# Altium PCB BeagleBoneCape.PcbDoc
Units mil, origin at the board's own origin, x right, y up, seen from the top; angles counter-clockwise.
Board outline 3400 x 2150 mil, 2 copper layers (L1, L2), stack 62.8 mil thick; 28 components, 19 nets, 178 pads, 13 vias.
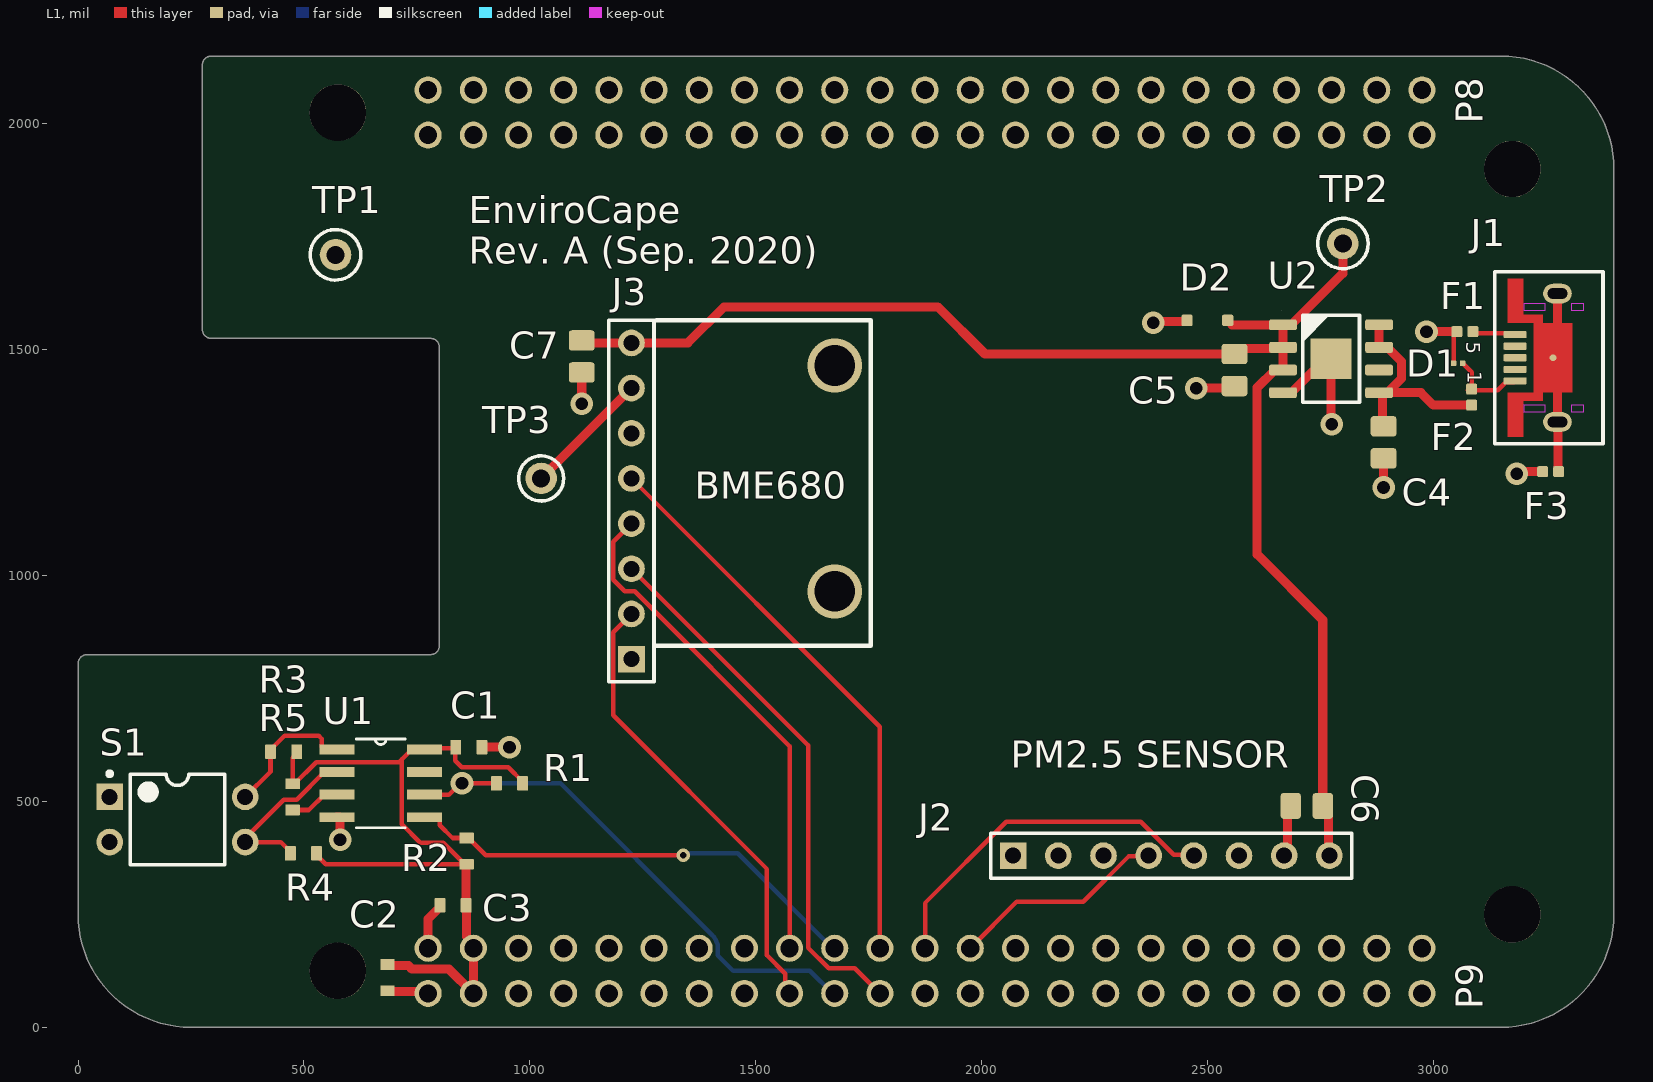
[diagram p0: L1 view]
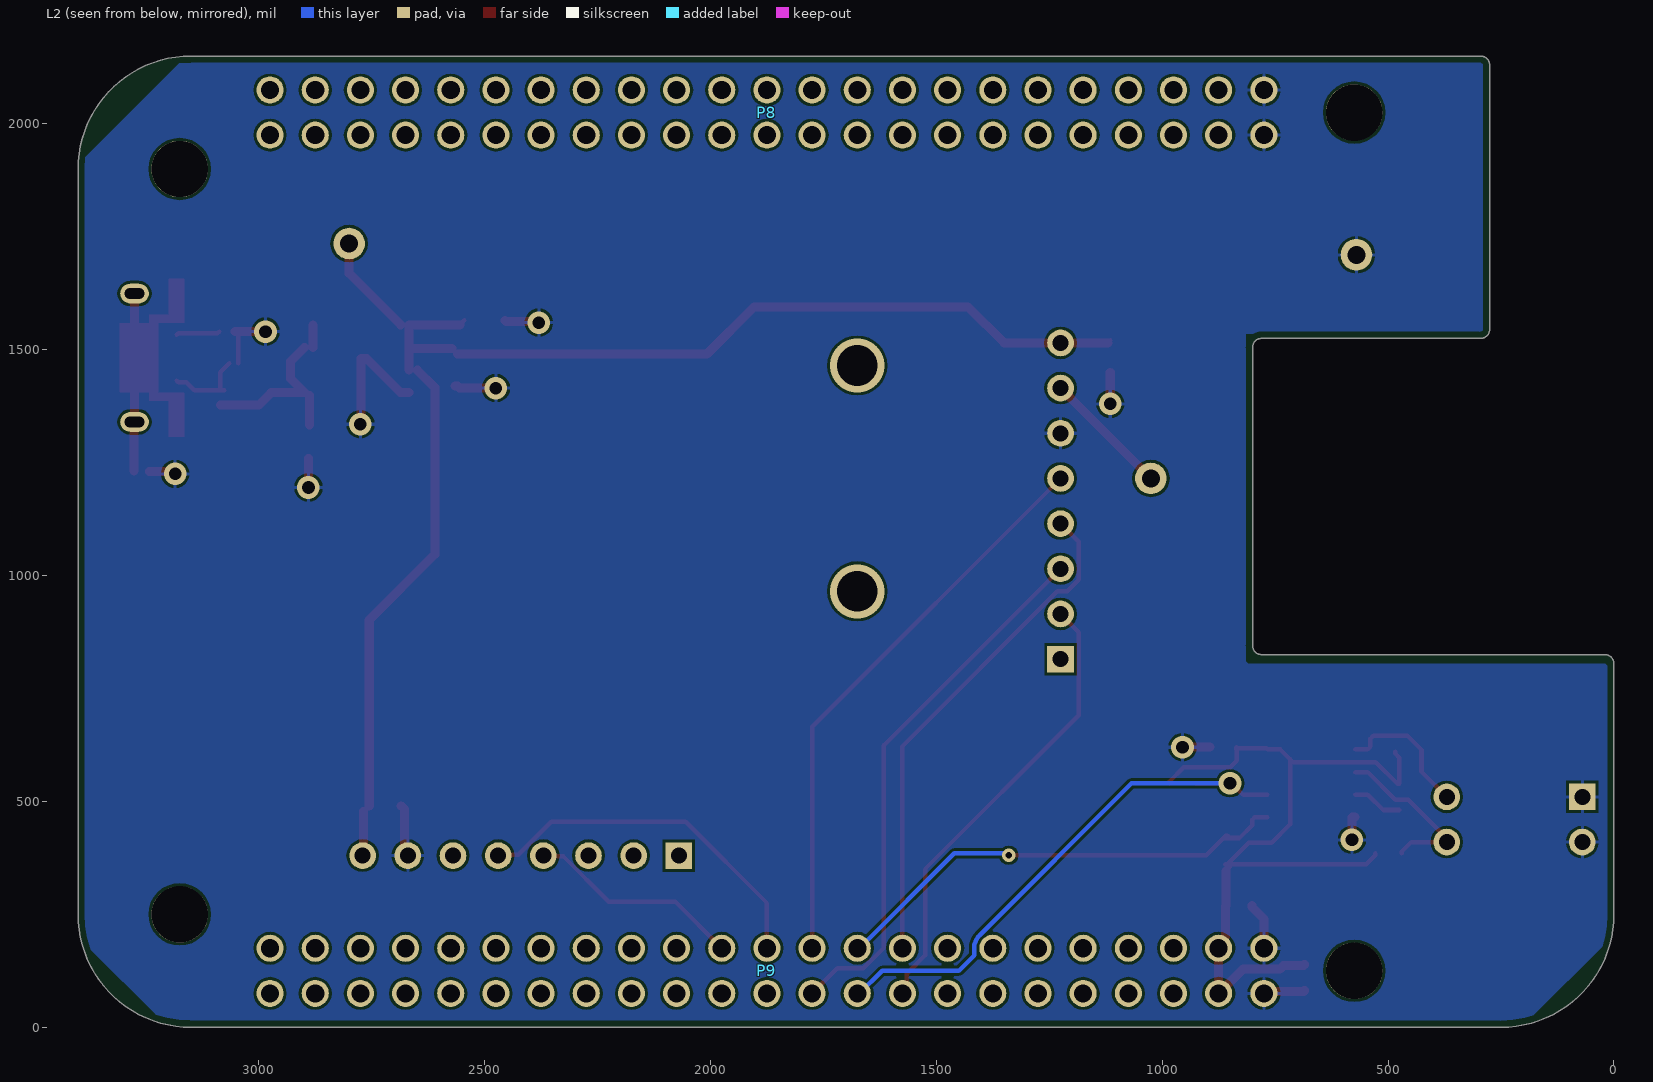
[diagram p1: L2 view, seen from below]

## Layer stack, top to bottom
Top Solder: solder mask 0.1, Solder Resist, Dk 1
L1: signal copper 1.4
Core: dielectric 60, FR-4, Dk 4.6
L2: signal copper 1.4
Bottom Solder: solder mask 0.1, Solder Resist, Dk 1

## Board outline
0,250 0,805 cw(c20,805) 20,825 780,825 ccw(c780,845) 800,845 800,1505 ccw(c780,1505) 780,1525 295,1525 cw(c295,1545) 275,1545 275,2130 cw(c295,2130) 295,2150 3150,2150 cw(c3150,1900) 3400,1900 3400,250 cw(c3150,250) 3150,0 250,0 cw(c250,250)

## Design rules (kind name [scope] priority, off if disabled: settings)
BoardOutlineClearance [All] p1: gap=15 ignorepadtopadclearanceinfootprint=FALSE
Clearance [All] p1: gap=6 ignorepadtopadclearanceinfootprint=FALSE except(0: Arc-Hole Track-Hole SMDPad-Hole THPad-Hole Via-Hole Fill-Hole Poly-Hole Region-Hole Text-Hole)
ComponentClearance [All] p1: gap=1 collisioncheckmode=3 verticalgap=1 showdistances=FALSE
DiffPairsRouting [All] p1: maxlimit=393.7 minlimit=6 mostfreqgap=8 toplayer_minwidth=6 toplayer_maxwidth=15 toplayer_prefwidth=8 bottomlayer_minwidth=6 bottomlayer_maxwidth=15 bottomlayer_prefwidth=8 maxuncoupledlength=500
HoleSize [All] p1: absolutevalues=TRUE maxlimit=265 minlimit=13 maxpercent=80.000 minpercent=20.000
HoleToHoleClearance [All] p1: gap=10 allowstackedmicrovias=FALSE
MinimumAnnularRing [All] p1: minimumring=7
MinimumSolderMaskSliver [All] p1: minsoldermaskwidth=0
PlaneClearance [All] p1: clearance=10
PlaneConnect [All] p1: planeconnectstyle=Direct reliefexpansion=16 reliefentries=4 reliefconductorwidth=6 reliefairgap=6
PolygonConnect [All] p1: connectstyle=Relief reliefconductorwidth=8 reliefentries=4 polygonreliefangle="90 Angle" airgapwidth=6
RoutingCorners [All] p1: cornerstyle=45-Degree minsetback=49.21 maxsetback=49.21
RoutingVias [All] p1: holewidth=15 width=30 viastyle="Through Hole" minholewidth=13 minwidth=27 maxholewidth=100 maxwidth=114
SilkToSilkClearance [All] p1: silktosilkclearance=0
SilkToSolderMaskClearance [IsPad] p1: minsilkscreentomaskgap=6 clearancetoexposedcopper=TRUE
SolderMaskExpansion [All] p1: expansion=2.95 istentingtop=FALSE
Width Width_GND [InNet('GND')] p1: maxlimit=400 minlimit=10 preferedwidth=20 minimp=50.000000 maximp=50.000000 favimp=50.000000
20 further rules are at their usual default settings.

## Components (designator, comment, footprint, x,y, rotation, side; value= is the part's Value field where it differs from the comment)
C1 "0.1UF" 0603-CAP 865,620 r0 top
C2 "0.1UF" 0603-CAP 685,110 r90 top
C3 "0.1UF" 0603-CAP 830,270 r180 top
C4 "1UF" CAPC2013X140N 2890,1295 r270 top
C5 "10UF" CAPC2013X145N 2560,1455 r270 top
C6 "10UF" CAPC2013X145N 2720,490 r0 top
C7 "10UF" CAPC2013X145N 1115,1485 r270 top
D1 "ESD8472" 0201-TVS 3055,1470 r0 top
D2 "30V 500mA" SOD-323 2500,1565 r180 top
F1 "220 R" INDC1005X55N 3070,1540 r180 top
F2 "220 R" INDC1005X55N 3085,1395 r90 top
F3 "220 R" INDC1005X55N 3260,1230 r180 top
J1 "ZX62WD1-B-5PC" HIROSE_ZX62WD1-B-5PC 3255.75,1482.13 r90 top
J2 "8x2.54 mm socket" HDR1X8 2070,380 r0 top
J3 "8x2.54 mm socket" HDR1X8 1225,815 r90 top
P8 "BBB_P8" BBB_CAPE_HEADER 775,1975 r180 bottom
P9 "BBB_P9" BBB_CAPE_HEADER 775,75 r180 bottom
R1 "5.6K" 0603-RES 955,540 r0 top
R2 "5.6K" 0603-RES 860,390 r270 top
R3 "4.75K" 0603-RES 455,610 r0 top
R4 "4.75K" 0603-RES 499,385 r0 top
R5 "4.75K" 0603-RES 475,510 r90 top
S1 "SW DIP-2" DIP-4 220,460 r0 top
TP1 "5001" KEYSTONE_5001 570,1710 r0 top
TP2 "5001" KEYSTONE_5001 2800,1735 r0 top
TP3 "5001" Keystone_5001 1025,1215 r0 top
U1 "CAT24C256" SOIC127P600X175-8N 670,540 r0 top value="256Kb I2C EEPROM"
U2 "ADP7142ARDZ-5.0-R7" SOIC127P600X175-9N_ALT 2773.7,1480 r0 top

## Footprints (in the part's own frame and the unit in brackets; to place one, negate y for a bottom-side part, rotate by r counter-clockwise, add the part's x,y. Pads: shape width x height; smd on the part's side, far side on the other; paste and mask are expansions set on the pad)
0201-TVS [mil]
  rrect20% 12x12 smd paste+0 mask+1.5: 1(-10,0) 2(10,0)
  L1 pour cut-out: -10,-17 -10,17 10,17 10,-17
  body extent -12,-6 12,6, height 11
0603-CAP [mil]
  rrect15% 24x32 smd paste-2 mask+2: 1(-29,0) 2(29,0)
  L1 pour cut-out: -13,32 13,32 13,-32 -13,-32
  body extent -32,-16 32,16, height 30
0603-RES [mil]
  rrect15% 24x32 smd paste-2 mask+2: 1(-29,0) 2(29,0)
  L1 pour cut-out: -13,32 13,32 13,-32 -13,-32
  body extent -32,-16 32,16, height 19
BBB_CAPE_HEADER [mil]
  round 60 hole 40: 1(0,0) 2(0,100) 3(-100,0) 4(-100,100) 5(-200,0) 6(-200,100) 7(-300,0) 8(-300,100) 9(-400,0) 10(-400,100) 11(-500,0) 12(-500,100) 13(-600,0) 14(-600,100) 15(-700,0) 16(-700,100) 17(-800,0) 18(-800,100) 19(-900,0) 20(-900,100) 21(-1000,0) 22(-1000,100) 23(-1100,0) 24(-1100,100) 25(-1200,0) 26(-1200,100) 27(-1300,0) 28(-1300,100) 29(-1400,0) 30(-1400,100) 31(-1500,0) 32(-1500,100) 33(-1600,0) 34(-1600,100) 35(-1700,0) 36(-1700,100) 37(-1800,0) 38(-1800,100) 39(-1900,0) 40(-1900,100) 41(-2000,0) 42(-2000,100) 43(-2100,0) 44(-2100,100) 45(-2200,0) 46(-2200,100)
CAPC2013X140N [mm]
  rrect30% 1.15x1.45 smd: 1(-0.9,0) 2(0.9,0)
  body extent -1,-0.63 1,0.63, height 1.4
CAPC2013X145N [mm]
  rrect30% 1.15x1.45 smd: 1(-0.9,0) 2(0.9,0)
  body extent -1,-0.63 1,0.63, height 1.45
DIP-4 [mm] "DIP; 4 Leads; Row Spacing 7.62 mm; Pitch 2.54 mm"
  rect 1.5x1.5 hole 0.9: 1(-3.81,1.27)
  round 1.5 hole 0.9: 2(-3.81,-1.27) 3(3.81,-1.27) 4(3.81,1.27)
  silkscreen extent -3.93,-2.55 2.65,2.69, body extent -3.15,-2.5 3.15,2.5, height 5.6
HDR1X8 [mm] "Connector; Header; 8 Position"
  rect 1.5x1.5 hole 0.9: 1(0,0)
  round 1.5 hole 0.9: 2(2.54,0) 3(5.08,0) 4(7.62,0) 5(10.16,0) 6(12.7,0) 7(15.24,0) 8(17.78,0)
  silkscreen extent -1.27,-1.27 19.05,1.27
HIROSE_ZX62WD1-B-5PC [mm]
  rrect30% 0.4x1.3 smd mask+0.051: 1(-1.3,1.891) 2(-0.65,1.891) 3(0,1.891) 4(0.65,1.891) 5(1.3,1.891)
  oval 1.108x1.608 hole 1.1 slot 0.6 at 0 deg mask+0.051: A(-3.61,-0.489) A(3.61,-0.489)
  round 0.381 smd mask+0.051: A(0,-0.239)
  L1 region: 4.457,1.411 4.457,2.311 1.95,2.311 1.95,1.411
  L1 region: 2.032,0.311 2.032,0.861 -2.425,0.861 -2.425,0.311
  L1 region: 1.95,-1.339 1.95,0.861 -1.95,0.861 -1.95,-1.339
  L1 region: -1.95,0.311 -1.95,2.311 -2.425,2.311 -2.425,0.311
  L1 region: 2.425,0.311 2.425,2.311 1.95,2.311 1.95,0.311
  L1 region: -1.95,1.411 -1.95,2.311 -4.457,2.311 -4.457,1.411
  L1 region: -4.318,2.809
  L1 keep-out region: -3.048,0.193 -2.667,0.193 -2.667,1.397 -3.048,1.397
  L1 keep-out region: 3.048,1.397 2.667,1.397 2.667,0.193 3.048,0.193
  L1 keep-out region: -3.048,-1.966 -2.667,-1.966 -2.667,-1.255 -3.048,-1.255
  L1 keep-out region: 3.048,-1.255 2.667,-1.255 2.667,-1.966 3.048,-1.966
  silkscreen extent -4.83,-3.05 4.83,3.05, body extent -4.1,-2.66 4.1,2.34, height 3
INDC1005X55N [mm]
  rrect30% 0.62x0.62 smd: 1(-0.45,0) 2(0.45,0)
  body extent -0.5,-0.25 0.5,0.25, height 0.55
KEYSTONE_5001 [mil]
  round 70 hole 40: 1(0,0)
  silkscreen extent -56,-56 56,56, body extent -50,-50 50,50, height 185
Keystone_5001 [mil]
  round 70 hole 40: 1(0,0)
  silkscreen extent -50,-50 50,50, body extent -49,-49 49,49, height 182
SOD-323 [mil]
  rrect30% 25x25 smd paste+1.5: 1(-45,0) 2(45,0)
  body extent -50,-25 50,25, height 36
SOIC127P600X175-8N [mil]
  rect 78x22 smd: 1(-97,75) 2(-97,25) 3(-97,-25) 4(-97,-75) 5(97,-75) 6(97,-25) 7(97,25) 8(97,75)
  silkscreen extent -54,-98 54,98
SOIC127P600X175-9N_ALT [mm]
  rrect30% 1.55x0.6 smd: 1(-2.7,1.905) 2(-2.7,0.635) 3(-2.7,-0.635) 4(-2.7,-1.905) 5(2.7,-1.905) 6(2.7,-0.635) 7(2.7,0.635) 8(2.7,1.905)
  rect 2.29x2.29 smd paste-25.4: 9(0,0)
  silkscreen extent -1.6,-2.45 1.6,2.45, body extent -3,-2.45 3,2.45, height 1.75

## Part data
C1 C2 C3: library part "CAP CER 0.1UF 50V X7R 0603", "0.1µF ±5% 50V Ceramic Capacitor X7R 0603 (1608 Metric)", Dielectric=X7R, Package=0603, Supplier Part Number 1=311-1779-1-ND, Tolerance=5%, Voltage=50V, Material=CER, Mfg=Yageo, Mfg PN=CC0603JRX7R9BB104, Supplier 1=Digi-Key, Supplier 2=Mouser, Supplier Part Number 2=603-CC603JRX7R9BB104, Symbol Date=08-22-2016
C4: library part CAP_08053D105KAT2A, "1µF ±10% 25V Ceramic Capacitor X5R 0805 (2012 Metric)", Dielectric=X5R, Package=0805, Supplier Part Number 1=478-1409-1-ND, Tolerance=10%, Voltage=25V, MANF="AVX Corporation", MANF_P/N=08053D105KAT2A, Material=CER, Supplier 1=Digi-Key, Symbol Date=08-22-2016
C5 C6 C7: library part CAP_C2012X5R1E106K125AB, "10µF ±10% 25V Ceramic Capacitor X5R 0805 (2012 Metric)", Dielectric=X5R, Package=0805, Supplier Part Number 1=445-5984-1-ND, Tolerance=10%, Voltage=25V, MANF="TDK Corporation", MANF_P/N=C2012X5R1E106K125AB, Material=CER, Supplier 1=Digi-Key, Symbol Date=08-22-2016
D1: "20V Clamp 3A (8/20µs) Ipp Tvs Diode Surface Mount 2-X3DFN (0.62x0.32)", Supplier Part Number 1=ESD8472MUT3GOSCT-ND, MANF="ON SEMICONDUCTOR", MANF_P/N=ESD8472MUT3G, Supplier 1=Digi-Key, Supplier 2=Mouser, Supplier Part Number 2=863-ESD8472MUT5G
D2: library part "DIODE SCHOTTKY 30V 500MA SOD323", "Diode Schottky 30V 500mA (DC) Surface Mount SOD-323", Supplier Part Number 1=863-NSR0530HT1G, MANF="ON Semi", MANF_P/N=NSR0530HT1G, Supplier 1=Mouser, Supplier 2=Digi-Key, Supplier Part Number 2=NSR0530HT1GOSCT-ND, Symbol Date=08-25-2016
F1 F2 F3: library part FB_BLM15EG221SN1D, "220 Ohms @ 100MHz 1  Ferrite Bead 0402 (1005 Metric) 700mA 280mOhm", Supplier Part Number 1=490-4005-1-ND, MANF=Murata, MANF_P/N=BLM15EG221SN1D, Supplier 1=Digi-Key, Version=1.0, VersionDate=12-08-2015
J1: library part USB2_MICRO, "USB - micro B USB 2.0 Receptacle Connector 5 Position Surface Mount, Right Angle", Supplier Part Number 1=H12193CT-ND, MANF="Hirose Electric Co Ltd", MANF_P/N=ZX62WD1-B-5PC, Note="Micro USB Socket", Supplier 1=Digi-Key, Symbol Date=01-26-2016
J2 J3: library part HDR_TH_2.54_8, "0.1\" 8 pin thru hole receptacle", Supplier Part Number 1=S7006-ND, Mfg="Sullins Connector Solutions", Mfg PN=PPTC081LFBN-RC, Supplier 1=Digi-Key
R1 R2: library part RES_5.6K_0.1%_1/10_0603, "RES SMD 5.6K 0.1% 1/10W 0603", Supplier Part Number 1=YAG1699CT-ND, Mfg=Yageo, Mfg PN=RT0603BRD075K6L, Supplier 1=Digi-Key, Supplier 2=Mouser, Supplier Part Number 2=603-RT0603BRD075K6L
R3 R4 R5: library part RES_4.75K_0.1%_1/10_0603, "RES SMD 4.75K 0.1% 1/10W 0603", Supplier Part Number 1=YAG2310CT-ND, Mfg=Yageo, Mfg PN=RT0603BRD074K75L, Supplier 1=Digi-Key, Supplier 2=Mouser, Supplier Part Number 2=603-RT0603BRD074K75L
S1: "DIP Switch, 2 Position, SPST", LatestRevisionDate=17-Jul-2002, LatestRevisionNote="Re-released for DXP Platform.", PackageReference=DIP-4, Published=24-Mar-1999, Publisher="Altium Limited"
TP1 TP2 TP3: library part TP_5001, "Test Point, Black, 1-Pin THD, RoHS, Bulk", Alternate Color="5004K-ND / -TESTPOINTPCMINI.040\"DYELLOW / 5003K-ND / -TESTPOINTPCMINI.040\"DORANGE / 5002K-ND / -TESTPOINTPCMINI.040\"DWHITE / 5000K-ND / -TESTPOINTPCMINI.040\"DRED", Color=Black, Standard Package=100, Supplier Part Number 1=36-5001-ND, Catalog Drawings=5000Series, Category=TestandMeasurement, Datasheet URL=https://ciiva.com/datasheet-click-2917627?src=ciiva&sig=bd195616, Datasheet Version="Rev. G, 12/2008", Family=TestPoints, Kits="DKTGRS232C-KIT-ND / -TTLCONVERTER", MANF=Keystone, MANF_P/N=5001, Manufacturer URL=http://www.keyelco.com/, Material=Base,Nylon46,UL94V-0, Mounting Type="0.040\"(1.02mm)HoleDiameter", Online Catalog=ColorCodedTestPoints, Other Names=5001K, Packaging=Bulk, RoHS Information=RoHSComplianceStatement, Series=THM, Supplier 1=Digi-Key, Terminal="0.010\"x0.020\"(0.25mmx0.51mm)PhosphorBronzeWire,SilverPlated", Type=PCTestPoint,Miniature
U1: "EEPROM Memory IC 256Kb _32K x 8_ I2C 1MHz 500ns 8-SOIC", Supplier Part Number 1=CAT24C256WI-GT3OSCT-ND, Mfg=OnSemi, Mfg PN=CAT24C256WI-GT3, Supplier 1=Digi-Key, Supplier 2=Mouser, Supplier Part Number 2=698-CAT24C256WI-GT3
U2: library part IC_ADP7142ARDZ-5.0-R7, "Linear Voltage Regulator IC  1 Output  200mA 8-SOIC-EP", Supplier Part Number 1=584-P7142ARDZ-5.0-R7, MANF="Analog Devices", MANF_P/N=ADP7142ARDZ-5.0-R7, Supplier 1=Mouser, Supplier 2=Digi-Key, Supplier Part Number 2=ADP7142ARDZ-5.0-R7CT-ND

## Free pads (board coordinates)
  round 125 hole 125 unplated: NPTH(575,125) NPTH(575,2025) NPTH(3175,250) NPTH(3175,1900)

## Via types
v1: diameter 50, hole 28, L1 to L2, 10 vias
v2: diameter 120, hole 90, L1 to L2, 2 vias
v3: diameter 30, hole 15, L1 to L2, 1 vias

## Nets (pads, with @x,y where several pads share a name; then routed paths per layer and width w, separated by ;. In a path a pad name is that pad's centre, name@x,y a point inside that pad or via, vN(x,y) a via of type N, cw(c..) or ccw(c..) an arc to the next point about the centre after c; other vN are vias at no path point)
+3.3V: C1.1 C2.2 C3.1 P9.3 P9.4 R1.2 R2.2 R3.2 R4.2 R5.2 U1.8 | length 1846.1
  L1 w10: R3.2 484,606 475,597 R5.2 479,539 527,587 711,587 717,593 ; R4.2 528,381 548,361 R2.2@856,361 ; C1.1@836,616 C1.1 C1.1@835,619 ; R2.2@849,356 859,346 ; R2.2 R2.2@856,361 ; R1.2 984,544 952,576 849,576 835,590 C1.1@835,619 ; 717,593 717,449.44 757.72,408.72 808.28,408.72 R2.2@856,361 ; 717,593 739,615 U1.8 769.5,617.5 833.5,617.5 C1.1@835,619
  L1 w20: C2.2 687,137 731,137 739,129 821,129 P9.3 P9.4 875,185.82 860,200.82 860,269 C3.1 859,346
+5V: C5.1 C6.2 C7.1 D2.1 J2.8 J3.8 TP2.1 U2.1 U2.2 U2.3 | length 3285.6
  L1 w10: C7.1 C7.1@1120.43,1515 ; D2.1 D2.1@2555,1555 ; C5.1 C5.1@2572.71,1503.14 ; U2.3@2648.7,1455 U2.3 ; U2.2@2665.54,1503.14 U2.2 ; U2.1 U2.1@2686.1,1555 ; C6.2 C6.2@2768.14,477.29 ; J2.8@2768.14,381.86 J2.8
  L1 w20: C7.1@1120.43,1515 J3.8 1350,1515 1430,1595 1903.15,1595 2007.72,1490.43 C5.1 ; D2.1@2555,1555 U2.1 U2.2 U2.3 ; C5.1@2572.71,1503.14 U2.2@2665.54,1503.14 ; U2.3@2648.7,1455 2610,1416.3 2610,1047.01 2755.43,901.58 C6.2 ; U2.1@2686.1,1555 2800,1668.9 TP2.1 ; J2.8@2768.14,381.86 C6.2@2768.14,477.29
+5V_USB: C4.1 F2.1 U2.5 U2.7 U2.8 | length 475.1
  L1 w10: U2.7 U2.7@2898.7,1505 ; C4.1@2887.61,1332.82 C4.1 ; U2.5@2887.61,1398.19 2891.89,1398.19 U2.5@2898.7,1405
  L1 w20: U2.7 U2.8 ; C4.1@2887.61,1332.82 U2.5@2887.61,1398.19 ; U2.7@2898.7,1505 2930,1473.7 2930,1436.3 2898.7,1405 2972.76,1405 3000.47,1377.28 F2.1
GND: C1.2 C2.1 C3.2 C4.2 C5.2 C6.1 C7.2 D1.1 D2.2 F1.2 F3.2 J2.7 J3.6 P8.1 P8.2 P9.1 P9.2 S1.1 S1.2 TP1.1 U1.4 U2.4 U2.9 | length 1218.3
  L1 w10: D1.1 3045,1526.94 3045.08,1527.02 3045.08,1532.8 F1.2
  L1 w20: U1.4 579,465 580,464 v1(580,415) ; C2.1 687,79 771,79 P9.1 ; P9.2 775,240 801,266 C3.2 ; C1.2 v1(955,620) ; v1(1115,1380) C7.2 ; v1(2380,1560) 2382.5,1562.5 2452.5,1562.5 D2.2 ; v1(2475,1415) 2555.43,1415 C5.2 C5.2@2565.91,1419.57 ; U2.4 2686.1,1405 2761.1,1480 U2.9 2773.7,1336.3 v1(2775,1335) ; J2.7 2677.28,387.28 2677.28,482.72 C6.1 ; v1(2890,1195) C4.2 ; v1(2985,1540) 3045,1540 F1.2 ; v1(3185,1225) 3190,1230 F3.2
I2C2_SCL: P9.19 R1.1 U1.6 | length 1205
  L1 w10: U1.6 821,515 846,540 v1(850,540) R1.1
  L2 w10: v1(850,540) 1067.98,540 1403.99,203.99 cw(c1375,175) 1414.68,185.32 1416,184 1416,159 1450,125 1620,125 1670,75 P9.19
I2C2_SDA: P9.20 R2.1 U1.5 | length 1046.5
  L1 w10: U1.5@767.5,464.5 U1.5 795,465 801,459 801,447 829,419 R2.1 ; R2.1@855,424 859,424 902.29,380.71 v3(1339.64,380.71)
  L2 w10: v3(1339.64,380.71) 1343.93,385 1460,385 1670,175 P9.20
NetD1_2: D1.2 F2.2 J1.1 | length 178.8
  L1 w10: D1.2 3085,1450 F2.2 ; F2.2@3076.7,1410 3142.64,1410 3160.71,1428.07 3178.43,1428.07 J1.1
NetF1_1: F1.1 J1.5 | length 96.4
  L1 w10: F1.1 3091.54,1536.18 3178.43,1536.18 J1.5
NetF3_1: F3.1 J1.A | length 395.4
  L1 w10: J1.A@3275,1340 J1.A@3276.36,1338.64 ; F3.1@3276.36,1231.36 F3.1
  L1 w20: J1.A@3275,1340 J1.A@3275,1624.25 ; F3.1@3276.36,1231.36 J1.A@3276.36,1338.64
NetJ3_7: J3.7 TP3.1 | length 282.8
  L1 w20: TP3.1 J3.7
NetR3_1: R3.1 S1.4 U1.1 | length 310.1
  L1 w10: S1.4 426,566 R3.1 426,614 457,645 533.14,645 539,639.14 539,621 545,615 U1.1
NetR4_1: R4.1 S1.3 U1.2 | length 384.9
  L1 w10: R4.1 470,389 449,410 S1.3 370,418.5 455.5,504 484,504 545,565 U1.2
NetR5_1: R5.1 U1.3 | length 112.1
  L1 w10: R5.1 511,481 545,515 U1.3
SPI0_CS0: J3.2 P9.17 | length 1018.5
  L1 w10: J3.2 1184.47,874.47 1184.47,690.86 1525,350.34 1525,159.26 1565.43,118.83 1565.43,84.57 P9.17
SPI0_DI: J3.4 P9.18 | length 1131.6
  L1 w10: J3.4 1184.47,1074.47 1184.47,990.53 1210,965 1232.31,965 1575,622.31 P9.18
SPI0_DO: J3.3 P9.21 | length 1201.8
  L1 w10: J3.3 1616,624 1616,176.02 1661.73,130.29 1719.71,130.29 P9.21
SPI0_SCLK: J3.5 P9.22 | length 1267.8
  L1 w10: J3.5 1775,665 P9.22
UART1_RXD: J2.4 P9.26 | length 479.9
  L1 w10: P9.26 2077.59,277.59 2224.91,277.59 2325.47,378.16 2368.16,378.16 J2.4
UART1_TXD: J2.5 P9.24 | length 800.6
  L1 w10: P9.24 1875,275 2055,455 2352.31,455 2425.47,381.84 2468.16,381.84 J2.5
pads on no net: J1.2 J1.3 J1.4 J2.1 J2.2 J2.3 J2.6 J3.1 P8.3 P8.4 P8.5 P8.6 P8.7 P8.8 P8.9 P8.10 P8.11 P8.12 P8.13 P8.14 P8.15 P8.16 P8.17 P8.18 P8.19 P8.20 P8.21 P8.22 P8.23 P8.24 P8.25 P8.26 P8.27 P8.28 P8.29 P8.30 P8.31 P8.32 P8.33 P8.34 P8.35 P8.36 P8.37 P8.38 P8.39 P8.40 P8.41 P8.42 P8.43 P8.44 P8.45 P8.46 P9.5 P9.6 P9.7 P9.8 P9.9 P9.10 P9.11 P9.12 P9.13 P9.14 P9.15 P9.16 P9.23 P9.25 P9.27 P9.28 P9.29 P9.30 P9.31 P9.32 P9.33 P9.34 P9.35 P9.36 P9.37 P9.38 P9.39 P9.40 P9.41 P9.42 P9.43 P9.44 P9.45 P9.46 U1.7 U2.6
copper on no net:
  other v2: 1675,965 1675,1465

## Polygon pours and split planes (outlines as drawn)
GND on L2 "GND_L02_P000" (solid, pour order 0): 280,2145 285,2150 3170,2150 3170,2140 3400,1910 3395,1905 3395,195 3195,-5 210,-5 -5,210 0,215 0,805 810,805 815,810 815,1535 285,1535 280,1530

## Silkscreen, mask and mechanical layers (free items; w line width, h text height)
Top Overlay:
  lines w10: 1280,845 1755,845 1755,1565 1280,1565
  text "EnviroCape / Rev. A (Sep. 2020)" at 865,1690 h60
  text "BME680" at 1365,1170 h60
  text "PM2.5 SENSOR" at 2065,575 h60
Mechanical 1:
  the board outline again, w10

## Text inside footprints (layer, text, board x,y; h text height)
J1: Mechanical 13 "1" at 3177.65,1438.15 h40 r270; Top Overlay "1" at 3076.14,1452.13 h31.5 r270; Top Overlay "5" at 3073.15,1517.13 h31.5 r270; Mechanical 30 "PCB EDGE" at 3386.3,1357.13 h40 r90